# Altium PCB PCB1.PcbDoc
Units mm, origin at the board's own origin, x right, y up, seen from the top; angles counter-clockwise.
Board outline 81.41 x 64.13 mm, 2 copper layers (Top Layer, Bottom Layer); 18 components, 11 nets, 49 pads, 9 vias.
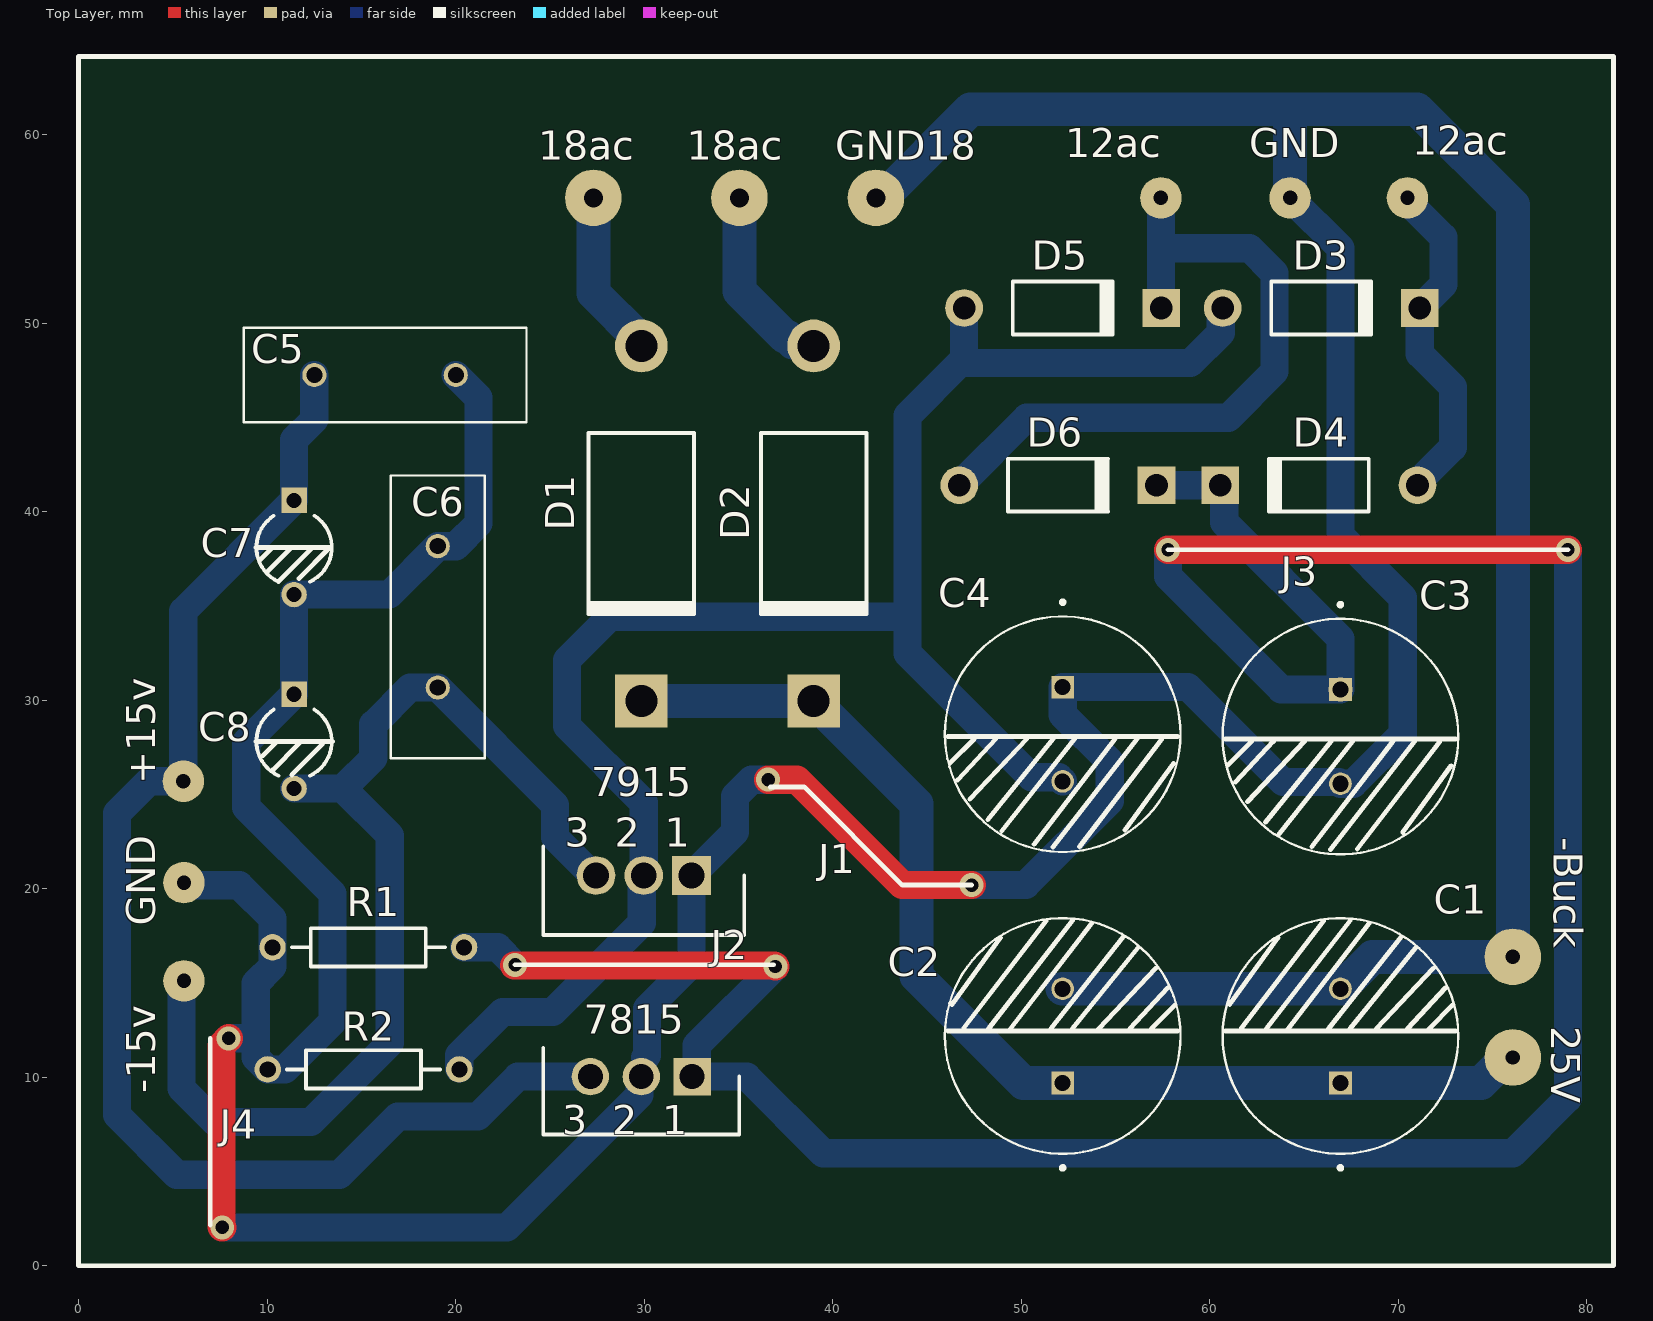
[diagram p0: Top Layer view]
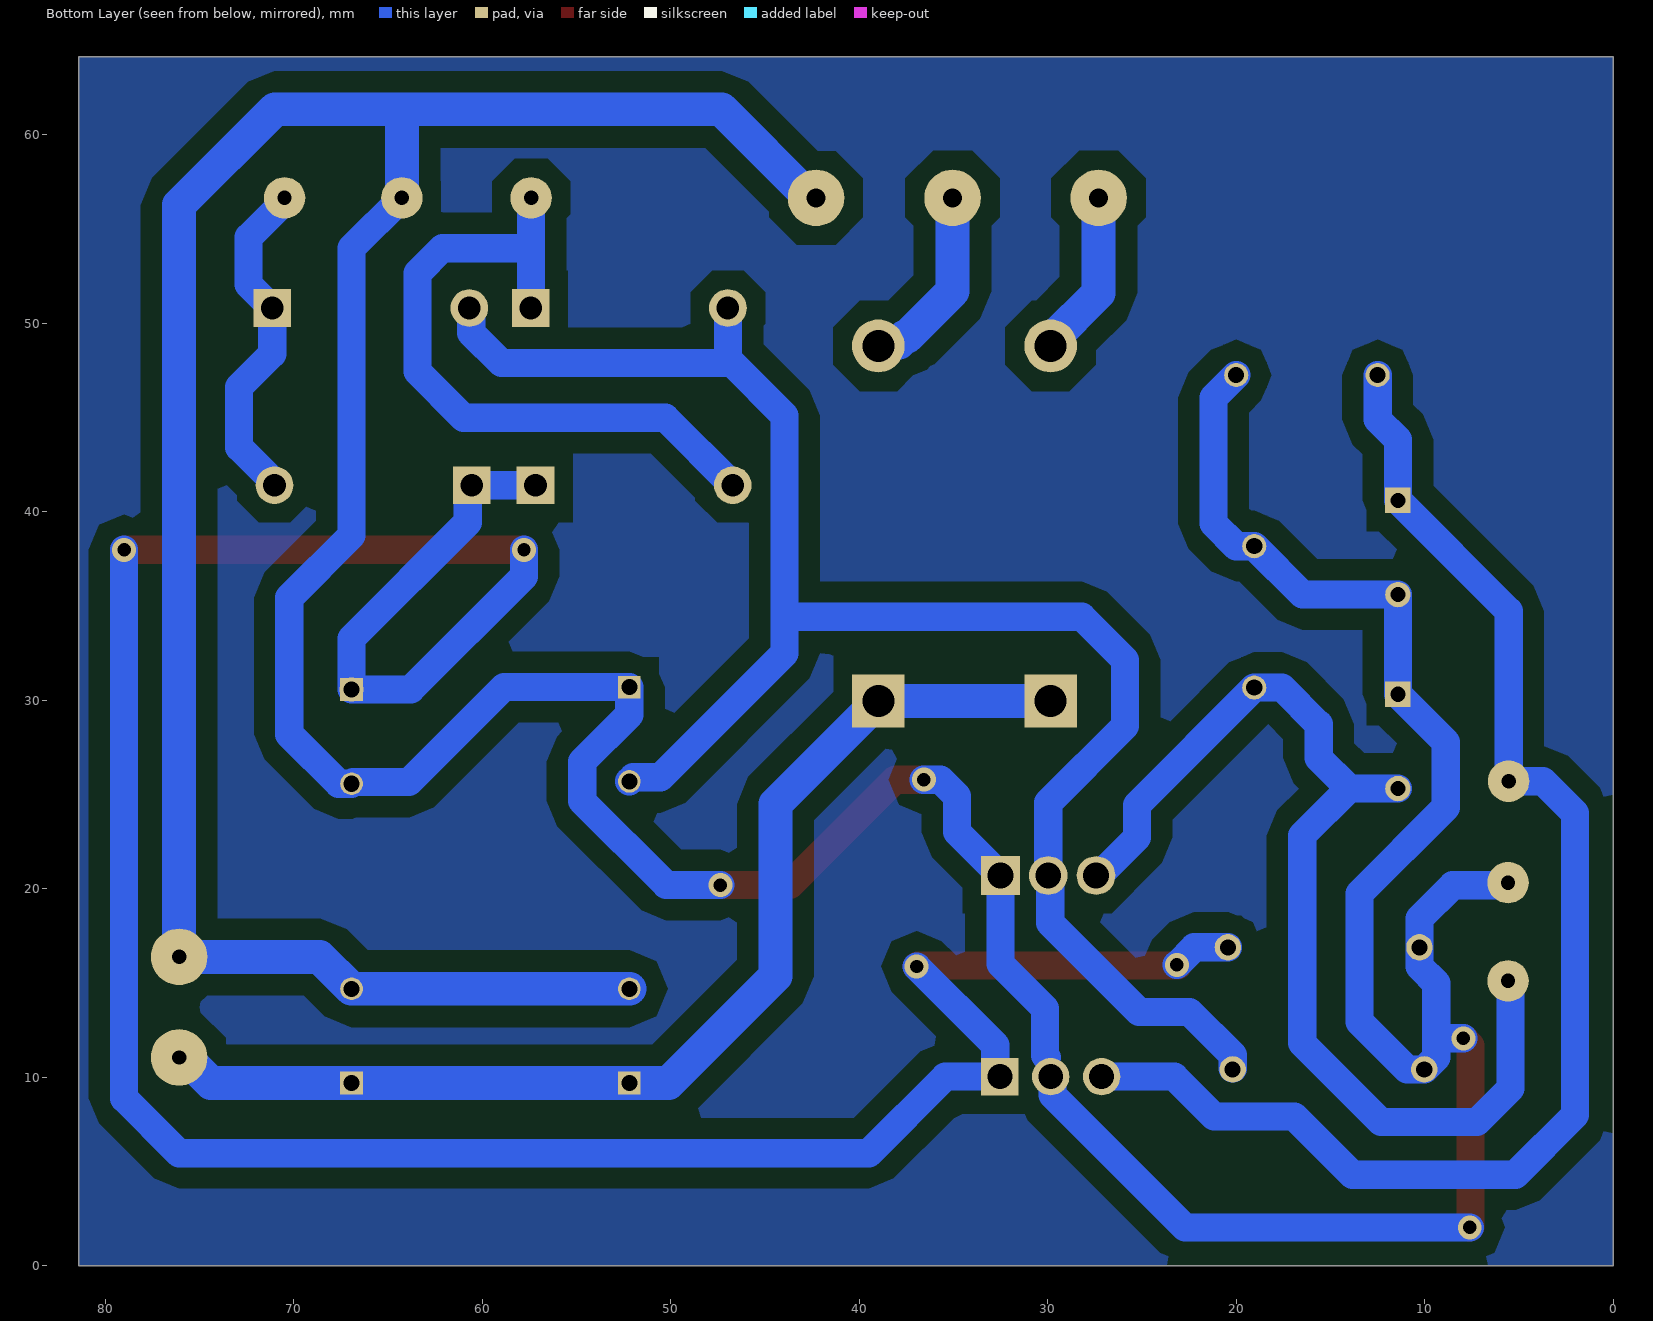
[diagram p1: Bottom Layer view, seen from below]

## Layer stack, top to bottom
Top Solder: solder mask 0.0102, Solder Resist, Dk 3.5
Top Layer: signal copper 0.0356
Dielectric 1: dielectric 0.32, FR-4, Dk 4.8
Bottom Layer: signal copper 0.0356
Bottom Solder: solder mask 0.0102, Solder Resist, Dk 3.5

## Board outline
0,0 81.407,0 81.407,64.135 0,64.135

## Design rules (kind name [scope] priority, off if disabled: settings)
Clearance [All] p1: gap=1 ignorepadtopadclearanceinfootprint=FALSE except(0: Arc-Via Arc-Text Arc-Hole Track-Via Track-Text Track-Hole SMDPad-Hole THPad-Hole Via-Text Via-Hole Fill-Text Fill-Hole Poly-Text Poly-Hole Region-Text Region-Hole Text-Hole; 0.1: Arc-THPad Track-THPad THPad-THPad Via-Fill Via-Poly Via-Region; 0.254: Arc-SMDPad Track-SMDPad SMDPad-SMDPad SMDPad-THPad SMDPad-Via SMDPad-Fill SMDPad-Poly SMDPad-Region SMDPad-Text THPad-Text Text-Text)
PolygonConnect [All] p1: connectstyle=Relief reliefconductorwidth=0.254 reliefentries=4 polygonreliefangle="90 Angle" airgapwidth=0.254
RoutingVias [All] p1: holewidth=0.711 width=1.27 viastyle="Through Hole" minholewidth=0.711 minwidth=1.27 maxholewidth=0.711 maxwidth=1.27
SolderMaskExpansion [All] p1: expansion=0.102 istentingtop=FALSE
Width [All] p1: maxlimit=1.8 minlimit=1.5 preferedwidth=1.5
30 further rules are at their usual default settings.

## Components (designator, comment, footprint, x,y, rotation, side; value= is the part's Value field where it differs from the comment)
7815 "L7815CV" TO270P460X1020X2008-3P 32.545,10.033 r180 top
7915 "LM7915CT" TO254P470X1016X2019-3P 32.512,20.701 r180 top
C1 "2200uF" CAPPRD500W60D1250H2500 66.929,12.192 r90 top
C2 "2200uF" CAPPRD500W60D1250H2500 52.197,12.192 r90 top
C3 "1000uF" CAPPRD500W60D1250H2500 66.929,28.067 r270 top
C4 "1000uF" CAPPRD500W60D1250H2500 52.197,28.194 r270 top
C5 "103" CAP_DE2E3SA103MA3BT02F 16.256,47.244 r180 top value=100pF
C6 "103" CAP_DE2E3SA103MA3BT02F 19.05,34.417 r90 top value=100pF
C7 "220uF" CAPR5-4X5 11.43,38.1 r270 top value=100pF
C8 "220uF" CAPR5-4X5 11.43,27.813 r270 top value=100pF
D1 "1N5408" DO-201AD 29.845,39.37 r270 top
D2 "1N5408" DO-201AD 38.989,39.37 r270 top
D3 "1N4007" DO-41 65.913,50.8 r0 top
D4 "1N4007" DO-41 65.786,41.402 r180 top
D5 "1N4007" DO-41 52.197,50.8 r0 top
D6 "1N4007" DO-41 51.943,41.402 r0 top
R1 "10k" AXIAL-0.4 15.367,16.891 r0 top value=1K
R2 "10k" AXIAL-0.4 15.113,10.414 r180 top value=1K

## Footprints (in the part's own frame and the unit in brackets; to place one, negate y for a bottom-side part, rotate by r counter-clockwise, add the part's x,y. Pads: shape width x height; smd on the part's side, far side on the other; paste and mask are expansions set on the pad)
AXIAL-0.4 [mm] "Axial Device, Thru-Hole; 2 Leads; 0.4 in Pin Spacing"
  round 1.4 hole 0.85: 1(-5.08,0) 2(5.08,0)
  silkscreen extent -4.06,-1.02 4.06,1.02
CAP_DE2E3SA103MA3BT02F [mm]
  round 1.28 hole 0.85: 1(-3.75,0) 2(3.75,0)
  silkscreen extent -7.5,-2.5 7.5,2.5
CAPPRD500W60D1250H2500 [mm]
  round 1.2 hole 0.85: N(2.5,0)
  rect 1.2x1.2 hole 0.85: P(-2.5,0)
  silkscreen extent -7.1,-6.25 6.25,6.25, body extent -6.25,-6.25 6.25,6.25, height 25
CAPR5-4X5 [mm] "Capacitor; 2 Leads"
  rect 1.35x1.35 hole 0.8: 1(-2.5,0)
  round 1.35 hole 0.8: 2(2.5,0)
  silkscreen extent -1.69,-2 1.82,2
DO-41 [mm] "Diode, Axial; Body 5.2 x 2.7 mm (LxDia. max), Lead Dia. 0.86 mm (max)"
  round 2 hole 1.2: 1(-5.23,0)
  rect 2x2 hole 1.2: 2(5.23,0)
  silkscreen extent -2.65,-1.4 2.75,1.4
DO-201AD [mm] "Diode, Axial; Body 9.5 x 5.6 mm (LxDia. max), Lead Dia. 1.32 mm (max)"
  round 2.8 hole 1.7: 1(-9.42,0)
  rect 2.8x2.8 hole 1.7: 2(9.42,0)
  silkscreen extent -4.8,-2.8 4.9,2.8
TO254P470X1016X2019-3P [mm]
  rect 2.055x2.055 / inner round 2.055 / far side rect 2.055x2.055 hole 1.37: 1(0,0)
  round 2.055 hole 1.37: 2(2.535,0) 3(5.07,0)
  silkscreen extent -2.8,-1.55 7.87,3.15, body extent -10,-3.38 10,3.38, height 5.8
TO270P460X1020X2008-3P [mm]
  rect 1.98x1.98 / inner round 1.98 / far side rect 1.98x1.98 hole 1.32: 1(0,0)
  round 1.98 hole 1.32: 2(2.7,0) 3(5.4,0)
  silkscreen extent -2.5,-1.53 7.9,3.07, body extent -10,-3.38 10,3.38, height 5.8

## Part data
7815: "L7815CV, Voltage Regulator, 1.5A 15 V, 3-Pin TO-220", Manufacturer_Name=STMicroelectronics, Mouser Part Number=511-L7815CV, Arrow Part Number=L7815CV, Arrow Price/Stock=https://www.arrow.com/en/products/l7815cv/stmicroelectronics?region=europe, Datasheet Link=http://www.st.com/web/en/resource/technical/document/datasheet/CD00000444.pdf, Geometry.Height=4.6mm, Manufacturer_Part_Number=L7815CV, Mouser Price/Stock=https://www.mouser.co.uk/ProductDetail/STMicroelectronics/L7815CV?qs=htKRmzjvioQnqIcNFSQfsw%3D%3D
7915: "ON Semiconductor LM7915CT Negative Voltage Regulator, 1A, -15 V, +/-4% 3-Pin, TO-220", Manufacturer_Name=onsemi, Mouser Part Number=512-LM7915CT, Arrow Part Number=LM7915CT, Arrow Price/Stock=https://www.arrow.com/en/products/lm7915ct/on-semiconductor, Datasheet Link=https://datasheet.datasheetarchive.com/originals/distributors/Datasheets_SAMA/07f7f5cfa7b45aeaa7d93e4c14459954.pdf, Geometry.Height=4.7mm, Manufacturer_Part_Number=LM7915CT, Mouser Price/Stock=https://www.mouser.co.uk/ProductDetail/ON-Semiconductor-Fairchild/LM7915CT?qs=AxPfoIcMNKKE4cliBai9zA%3D%3D
C1 C2: library part EEUFM1C222, "2200ÂµF 16V Aluminum Electrolytic Capacitors Radial, Can 7000 Hrs @ 105Â°C", Package="RADIAL-2 Panasonic", Availability="In Stock", Check_prices=https://www.snapeda.com/parts/EEUFM1C222/Panasonic/view-part/?ref=eda, MF=Panasonic, MP=EEUFM1C222, Price=None, Purchase-URL=https://pricing.snapeda.com/search/part/EEUFM1C222/?ref=eda, SnapEDA_Link=https://www.snapeda.com/parts/EEUFM1C222/Panasonic/view-part/?ref=snap
C3 C4: library part EEUHD1H102B, "CAP ALUM 1000UF 20% 50V RADIAL", Package="RADIAL-2 Panasonic", Availability="In Stock", Check_prices=https://www.snapeda.com/parts/EEU-HD1H102B/Panasonic/view-part/2335470/?ref=eda, MF=Panasonic, MP=EEU-HD1H102B, Price=None, SnapEDA_Link=https://www.snapeda.com/parts/EEU-HD1H102B/Panasonic/view-part/2335470/?ref=snap
C5 C6: library part Cap, "Capacitor", LatestRevisionDate=17-Jul-2002, LatestRevisionNote="Re-released for DXP Platform.", PackageDescription="Radial Cap, Thru-Hole; 2 Leads; 0.3 in Pin Spacing", PackageReference=RAD-0.3, Published=8-Jun-2000, Publisher="Altium Limited"
C7 C8: library part Cap2, "Capacitor", PackageDescription="Capacitor; 2 Leads", PackageReference=CAPR5-4X5, Published=23-Sep-2002, Publisher="Altium Limited"
D1 D2: library part "Diode 1N5408", "3 Amp Medium Power Silicon Rectifier Diode", ComponentLink1Description="Manufacturer Link", ComponentLink1URL=http://www.irf.com/, DatasheetVersion=Aug-1984, LatestRevisionDate=17-Jul-2002, LatestRevisionNote="Re-released for DXP Platform.", PackageDescription="Diode, Axial; Body 9.5 x 5.3 mm (LxDia. max), Lead Dia. 1.32 mm (max)", PackageReference=DO-201AD, Published=8-Jun-2000, Publisher="Altium Limited"
D3 D4 D5 D6: library part "Diode 1N4007", "1 Amp General Purpose Rectifier", Code_JEDEC=DO-204-AL, ComponentLink1Description="Manufacturer Link", ComponentLink1URL=http://www.fairchildsemi.com/, ComponentLink2Description=Datasheet, ComponentLink2URL=http://www.fairchildsemi.com/ds/1N%2F1N4001.pdf, DatasheetVersion=1998, LatestRevisionDate=17-Jul-2002, LatestRevisionNote="Re-released for DXP Platform.", PackageDescription="Diode, Axial; Body 5.2 x 2.7 mm (LxDia. max), Lead Dia. 0.86 mm (max)", PackageReference=DO-41, PackageVersion=Aug-1999, Published=8-Jun-2000, Publisher="Altium Limited"
R1 R2: library part Res2, "Resistor", LatestRevisionDate=17-Jul-2002, LatestRevisionNote="Re-released for DXP Platform.", PackageDescription="Axial Device, Thru-Hole; 2 Leads; 0.4 in Pin Spacing", PackageReference=AXIAL-0.4, Published=8-Jun-2000, Publisher="Altium Limited"

## Free pads (board coordinates)
  round 3 hole 1: 18(27.305,56.642) 18(35.052,56.642) 18(42.291,56.642)
  round 2.2 hole 0.762: 19(5.558,25.7) 19(5.588,15.113) 19(5.588,20.32) 19(57.404,56.642) 19(64.262,56.642) 19(70.485,56.642)
  round 3 hole 0.762: 19(76.073,11.049) 19(76.073,16.383)

## Via types
v1: diameter 1.27, hole 0.711, Top Layer to Bottom Layer, 9 vias

## Nets (pads, with @x,y where several pads share a name; then routed paths per layer and width w, separated by ;. In a path a pad name is that pad's centre, name@x,y a point inside that pad or via, vN(x,y) a via of type N, cw(c..) or ccw(c..) an arc to the next point about the centre after c; other vN are vias at no path point)
12Ac1: D3.2 D4.1 pad.19@70.485,56.642 | length 18.1
  Bottom Layer w1.5: pad.19@70.485,56.642 70.485,56.453 72.39,54.548 72.39,52.047 D3.2 71.143,48.364 72.898,46.609 72.898,43.419 71.016,41.537 D4.1
12Ac2: D5.2 D6.1 pad.19@57.404,56.642 | length 36.9
  Bottom Layer w1.5: D6.1 50.285,44.974 60.976,44.974 63.433,47.431 63.433,52.645 62.103,53.975 57.415,53.975 ; pad.19@57.404,56.642 57.415,56.631 57.415,53.975 ; D5.2 57.415,50.812 57.415,53.975
"18Ac in1": D1.1 pad.18@27.305,56.642 | length 8.9
  Bottom Layer w1.8: pad.18@27.305,56.642 27.305,51.601 29.845,49.061 D1.1
"18Ac in2": D2.1 pad.18@35.052,56.642 | length 10.1
  Bottom Layer w1.8: pad.18@35.052,56.642 35.052,51.689 37.465,49.276 37.592,49.276 37.887,48.981 38.798,48.981 D2.1
25V: C1.P C2.P D1.2 D2.2 pad.19@76.073,11.049 | length 60.5
  Bottom Layer w1.8: D1.2 D2.2 44.45,24.489 44.45,15.367 50.125,9.692 C2.P 74.391,9.692 75.748,11.049 pad.19@76.073,11.049
+15V: 7815.3 C5.2 C7.1 pad.19@5.558,25.7 | length 73.2
  Bottom Layer w1.5: C5.2 12.506,44.891 11.43,43.815 C7.1 5.558,34.728 5.558,25.7 3.729,25.7 2.032,24.003 2.032,8.001 5.207,4.826 13.843,4.826 16.931,7.914 21.179,7.914 23.298,10.033 26.923,10.033 7815.3@27.057,9.9
-15V: 7915.3 C6.1 C8.2 pad.19@5.588,15.113 | length 58.1
  Bottom Layer w1.5: pad.19@5.588,15.113 5.46,14.985 5.46,9.399 7.239,7.62 12.319,7.62 16.51,11.811 16.51,22.813 14.01,25.313 ; C8.2 14.01,25.313 ; 7915.3@27.319,20.674 25.273,22.72 25.273,24.444 C6.1 17.586,30.667 15.635,28.716 15.635,26.938 14.01,25.313
GND: 7815.2 7915.1 C3.N C4.P C5.1 C6.2 C7.2 C8.1 pad.19@5.588,20.32 pad.19@64.262,56.642 R1.1 R2.2 | length 205.7
  Top Layer w1.5: v1(7.62,2.032) 7.583,2.069 7.583,11.688 v1(7.96,12.065) ; v1(36.576,25.781) 38.1,25.781 43.688,20.193 v1(47.371,20.193)
  Bottom Layer w1.5: pad.19@5.588,20.32 5.722,20.186 8.516,20.186 10.287,18.415 R1.1 10.287,15.875 9.398,14.986 9.398,11.938 ; v1(7.62,2.032) 22.724,2.032 29.753,9.061 29.753,9.941 7815.2 ; v1(7.96,12.065) 9.271,12.065 9.398,11.938 ; C5.1 21.209,46.041 21.209,39.37 20.006,38.167 C6.2 16.483,35.6 C7.2 C8.1 8.89,27.773 8.89,24.317 13.462,19.745 13.462,12.945 10.931,10.414 R2.2 9.398,11.049 9.398,11.938 ; 30.045,11.049 30.153,11.157 30.153,13.643 32.512,16.002 7915.1 34.818,23.007 34.818,24.902 35.697,25.781 v1(36.576,25.781) ; v1(47.371,20.193) 50.232,20.193 54.697,24.658 54.697,26.73 52.197,29.23 C4.P 58.841,30.694 63.881,25.654 66.842,25.654 C3.N 67.604,25.567 70.231,28.194 70.231,35.433 66.929,38.735 66.929,53.975 pad.19@64.262,56.642
  Bottom Layer w1.8: pad.19@64.262,56.642 64.262,61.214
GND_buck: C1.N C2.N pad.18@42.291,56.642 pad.19@76.073,16.383 | length 102.3
  Bottom Layer w1.8: pad.18@42.291,56.642 42.616,56.642 47.315,61.341 70.993,61.341 76.073,56.261 76.073,16.383 68.62,16.383 C1.N C2.N
Net7815_1: 7815.1 C3.P D4.2 D6.2 R1.2 | length 154.1
  Top Layer w1.5: v1@23.114,15.922 36.91,15.922 v1(36.957,15.875) ; v1(57.785,37.973) v1(78.994,37.973)
  Bottom Layer w1.5: R1.2 22.225,16.891 v1(23.154,15.962) ; v1(36.957,15.875) 32.785,11.703 32.785,10.273 7815.1 35.433,10.033 39.497,5.969 76.073,5.969 78.994,8.89 v1(78.994,37.973) ; D6.2 D4.2 60.769,41.189 60.769,39.434 66.929,33.274 v1(66.929,30.567) 63.794,30.567 57.785,36.576 v1(57.785,37.973)
Net7915_2: 7915.2 C4.N D3.1 D5.1 R2.1 | length 94.6
  Bottom Layer w1.5: R2.1@20.193,10.464 20.193,11.176 22.479,13.462 25.146,13.462 29.871,18.187 29.871,20.595 7915.2 29.977,24.558 25.908,28.627 25.908,32.131 28.194,34.417 43.963,34.417 ; D5.1 46.967,48.092 ; 47.063,48.187 46.967,48.092 ; C4.N 51.983,25.908 50.546,25.908 43.963,32.491 43.963,34.417 ; D3.1 60.587,50.704 60.587,49.485 58.981,47.879 46.754,47.879 ; 43.963,34.417 43.963,45.088 46.754,47.879 ; 46.754,47.879 46.967,48.092

## Polygon pours and split planes (outlines as drawn)
no net on Bottom Layer "NONET_L02_P000" (solid, pour order 0): 0,0 81.407,0 81.407,64.135 0,64.135

## Silkscreen, mask and mechanical layers (free items; w line width, h text height)
Top Overlay:
  lines w0.254: 6.985,2.159 6.985,12.065 ; 9.398,27.813 13.462,27.813 ; 9.398,38.1 13.335,38.1 11.684,36.449 ; 9.652,37.465 10.287,38.1 ; 9.779,27.051 10.541,27.813 10.668,27.813 ; 10.033,36.83 11.303,38.1 11.43,38.1 ; 10.287,26.289 11.684,27.686 ; 10.351,38.1 10.287,38.1 ; 10.414,38.1 10.287,38.1 ; 10.598,36.281 12.417,38.1 12.446,38.1 ; 11.303,26.035 12.954,27.686 ; 23.154,15.962 36.87,15.962 ; 36.703,25.4 38.481,25.4 43.688,20.193 47.371,20.193 ; 46.101,12.446 58.293,12.446 ; 46.101,28.067 58.293,28.067 ; 46.228,26.67 47.498,27.94 ; 46.325,13.865 48.895,17.399 ; 46.624,25.767 48.641,27.94 ; 46.947,12.606 51.308,18.288 ; 47.27,24.74 50.292,27.94 ; 48.22,23.655 51.689,27.94 ; 48.26,12.573 52.719,18.306 ; 48.967,23.057 52.832,27.94 ; 49.415,12.564 53.721,18.161 ; 50.673,22.352 54.979,27.949 ; 51.562,12.573 55.427,17.456 ; 51.675,22.207 56.134,27.94 ; 52.705,12.573 56.174,16.858 ; 53.086,22.225 57.447,27.907 ; 54.102,12.573 57.124,15.773 ; 55.499,23.114 58.069,26.648 ; 55.753,12.573 57.77,14.746 ; 56.896,12.573 58.166,13.843 ; 57.785,37.973 78.994,37.973 ; 60.833,12.446 73.025,12.446 ; 60.833,27.94 73.025,27.94 ; 60.96,26.543 62.23,27.813 ; 61.057,13.865 63.627,17.399 ; 61.356,25.64 63.373,27.813 ; 61.679,12.606 66.04,18.288 ; 62.002,24.613 65.024,27.813 ; 62.952,23.528 66.421,27.813 ; 62.992,12.573 67.451,18.306 ; 63.699,22.93 67.564,27.813 ; 64.147,12.564 68.453,18.161 ; 65.405,22.225 69.711,27.822 ; 66.294,12.573 70.159,17.456 ; 66.407,22.08 70.866,27.813 ; 67.437,12.573 70.906,16.858 ; 67.818,22.098 72.179,27.78 ; 68.834,12.573 71.856,15.773 ; 70.231,22.987 72.801,26.521 ; 70.485,12.573 72.502,14.746 ; 71.628,12.573 72.898,13.843 ; 0,0 81.407,0 81.407,64.135 0,64.135 0,0
  text "12ac" at 70.739,58.928 h1.52
  text "12ac" at 52.324,58.801 h1.52
  text "GND" at 62.103,58.801 h1.52
  text "18ac" at 24.384,58.674 h1.52
  text "18ac" at 32.258,58.674 h1.52
  text "GND18" at 40.132,58.674 h1.52
  text "J3" at 63.754,36.068 h1.52
  text "+15v" at 4.064,25.527 h1.52 r90
  text "-Buck" at 78.232,22.733 h1.52 r270
  text "3  2  1" at 25.781,22.225 h1.52
  text "J1" at 39.243,20.828 h1.52
  text "GND" at 4.064,18.034 h1.52 r90
  text "J2" at 33.528,16.256 h1.52
  text "25V" at 78.105,12.7 h1.52 r270
  text "-15v" at 4.064,9.144 h1.52 r90
  text "3  2  1" at 25.654,6.985 h1.52
  text "J4" at 7.493,6.731 h1.52

## Dimensions
81.407,64.135 to 81.407,0 on Top Overlay
0,0 to 81.407,0 on Top Overlay